# Altium PCB PCB1.PcbDoc
Units mm, origin at the board's own origin, x right, y up, seen from the top; angles counter-clockwise.
Board outline 127 x 101.6 mm, 4 copper layers (Top Layer, Internal Plane 1, Internal Plane 2, Bottom Layer); 30 components, 122 nets, 267 pads, 13 vias.
Unrouted connection lines stored in the file: 7.
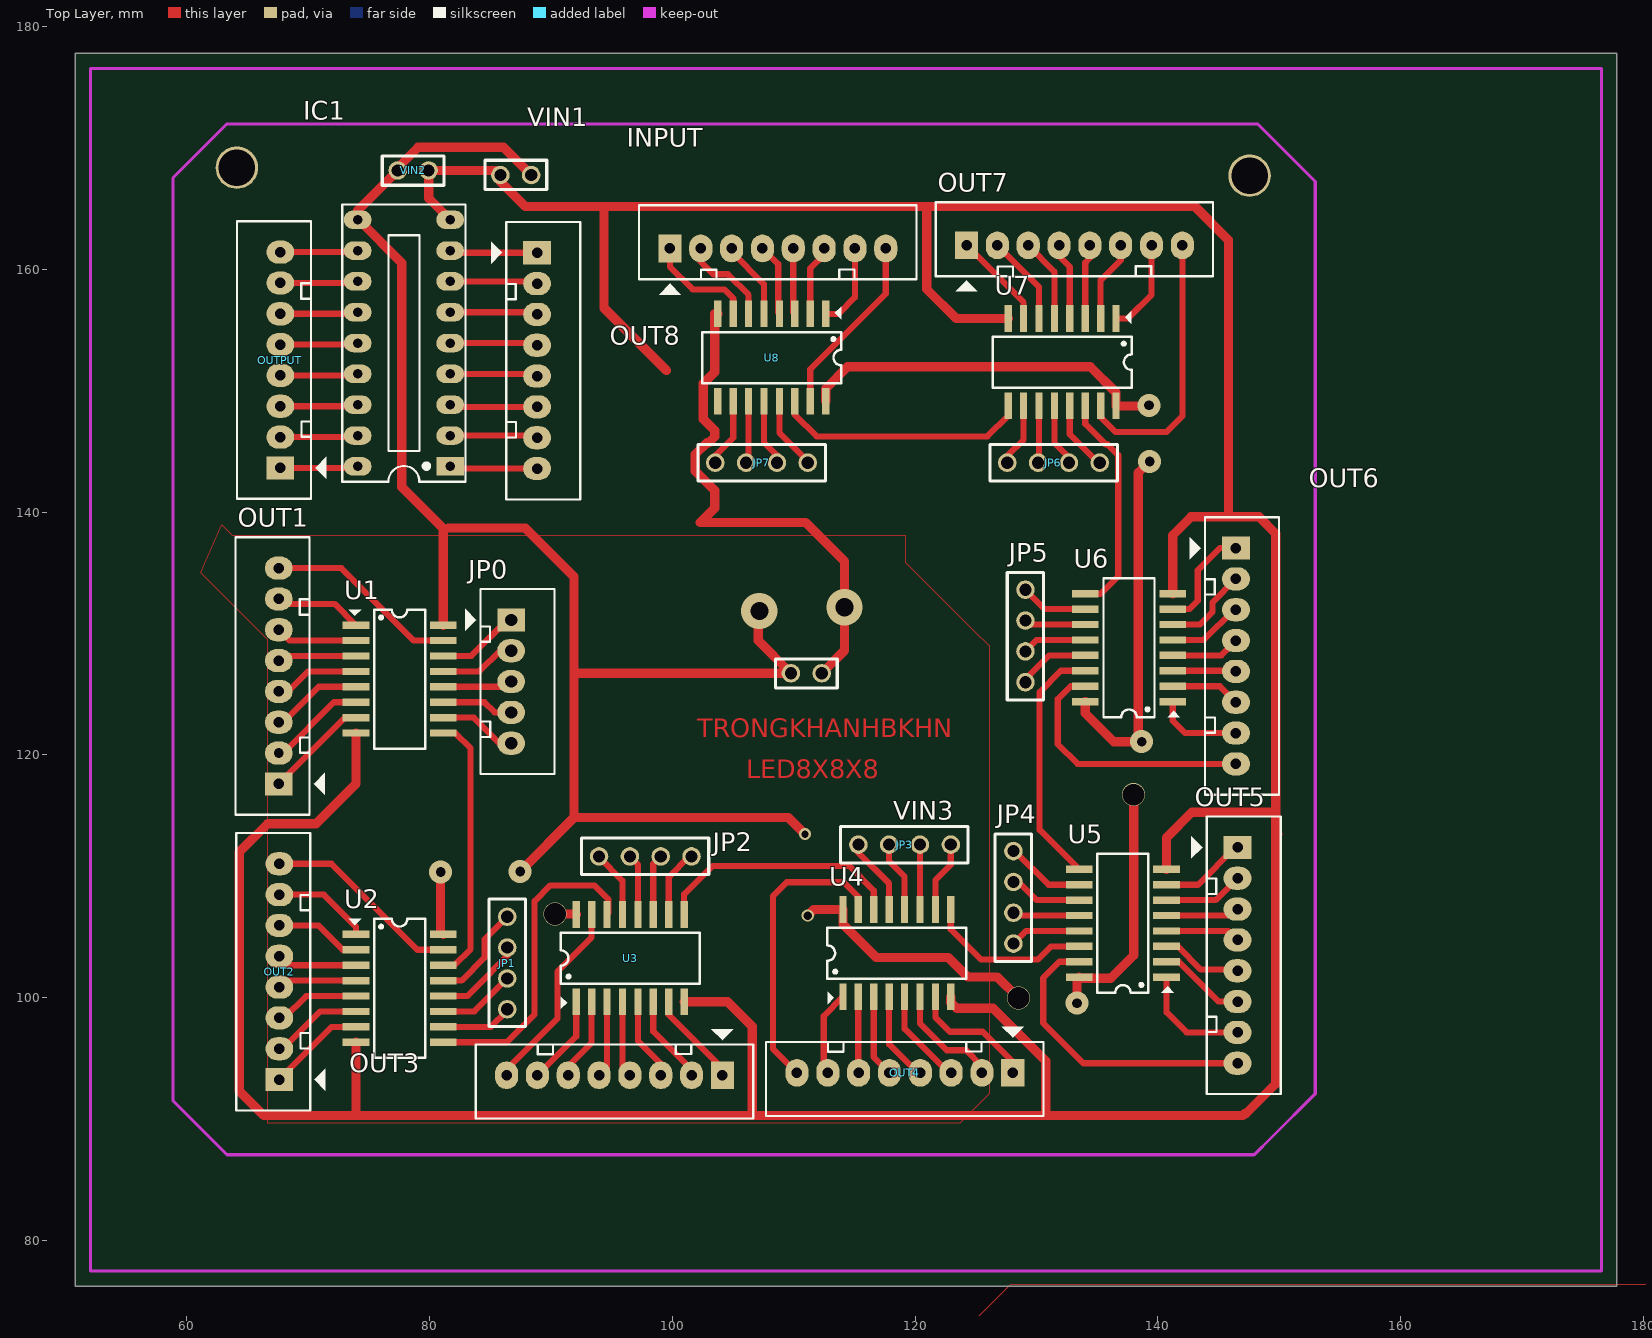
[diagram p0: Top Layer view]
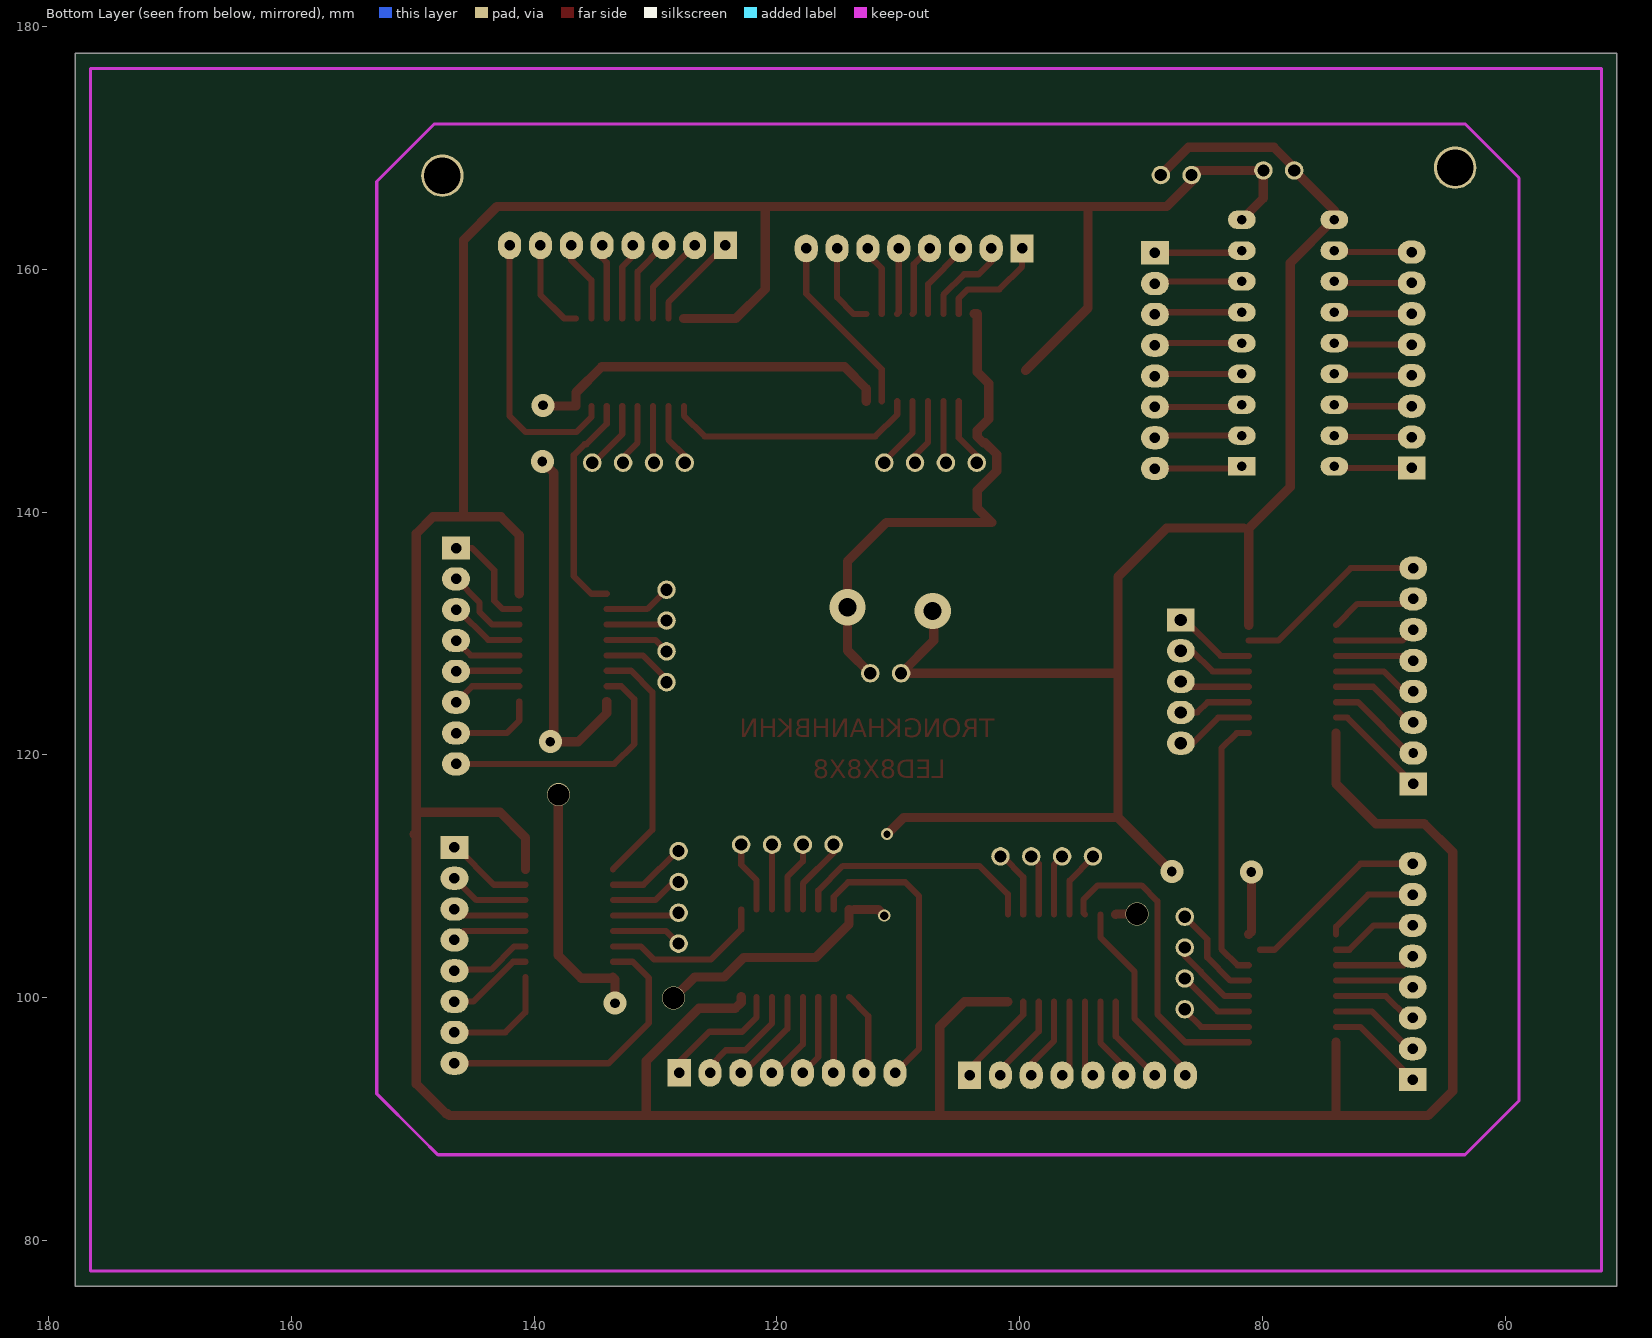
[diagram p1: Bottom Layer view, seen from below]
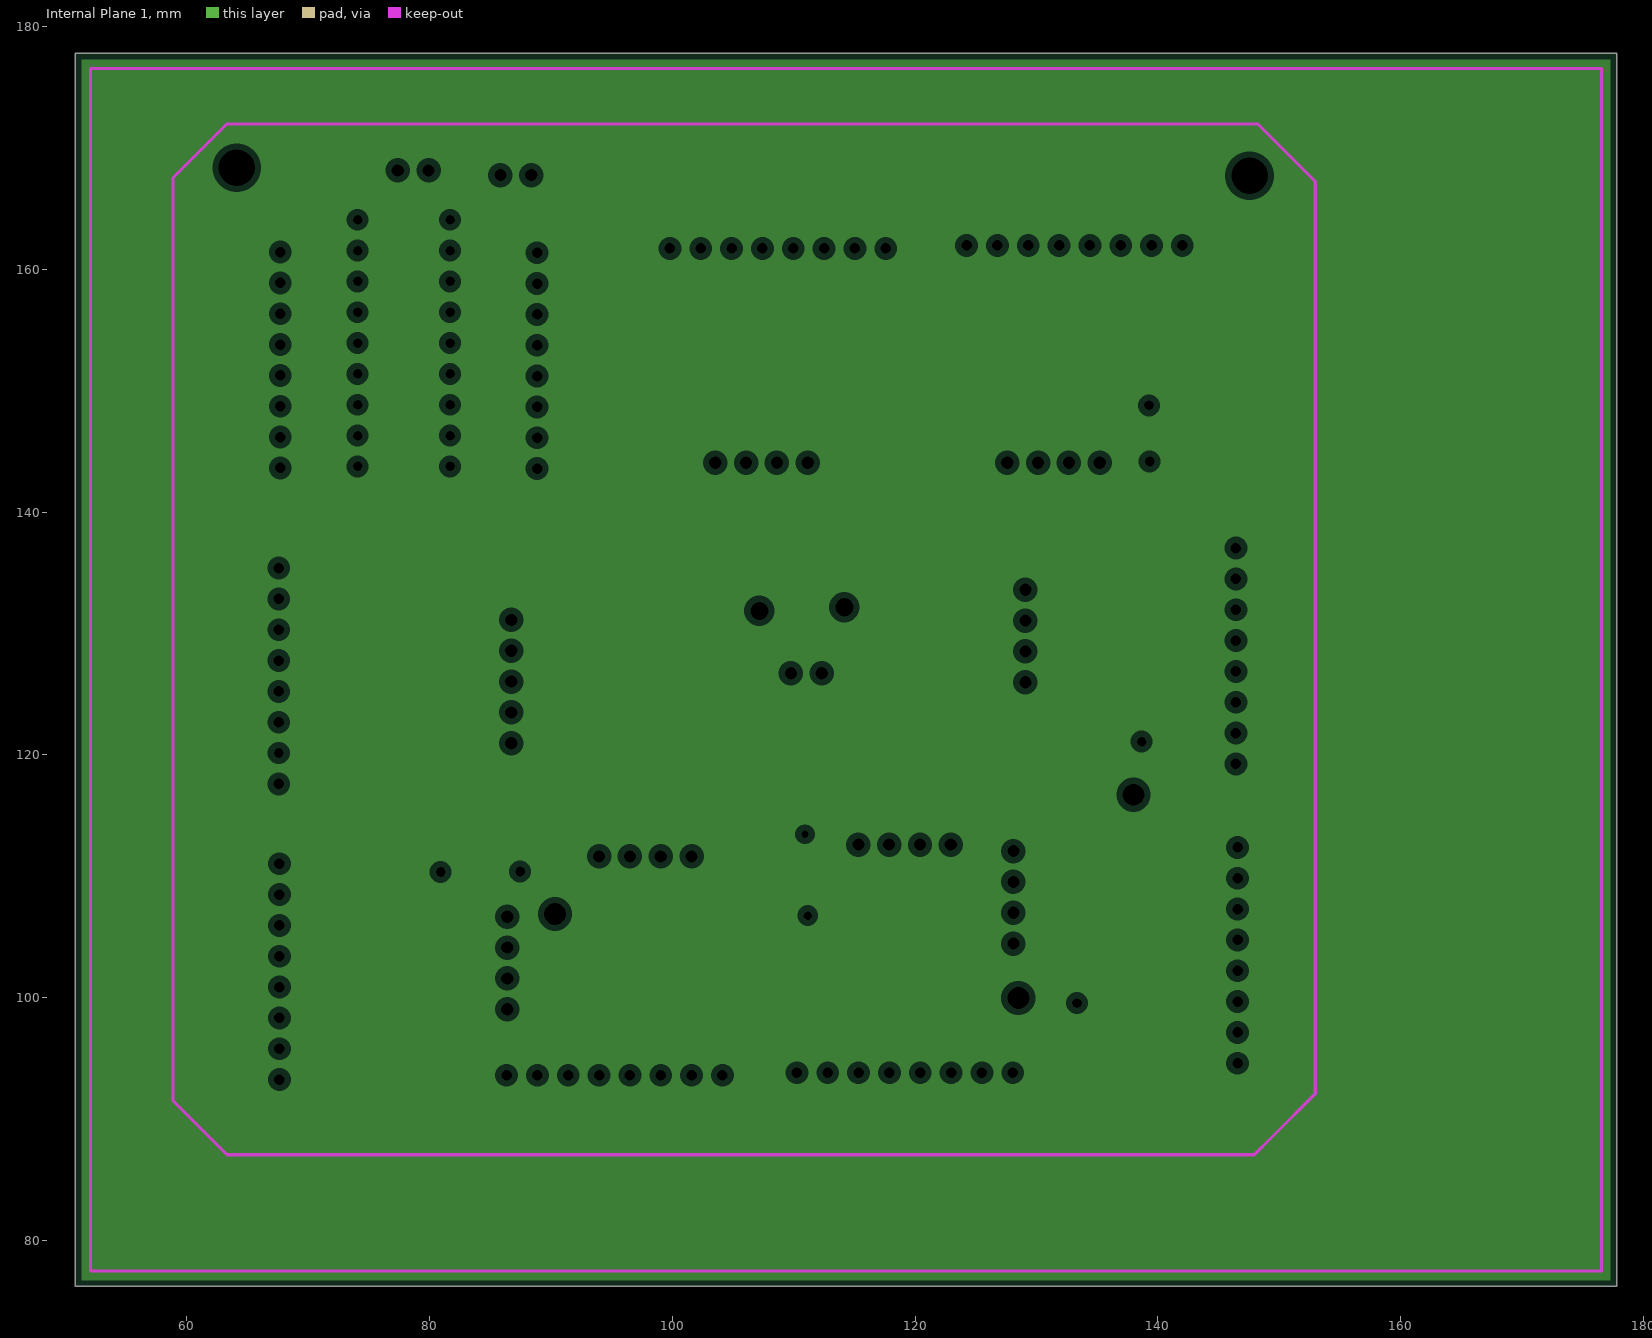
[diagram p2: Internal Plane 1, clearances drawn from the general rule]
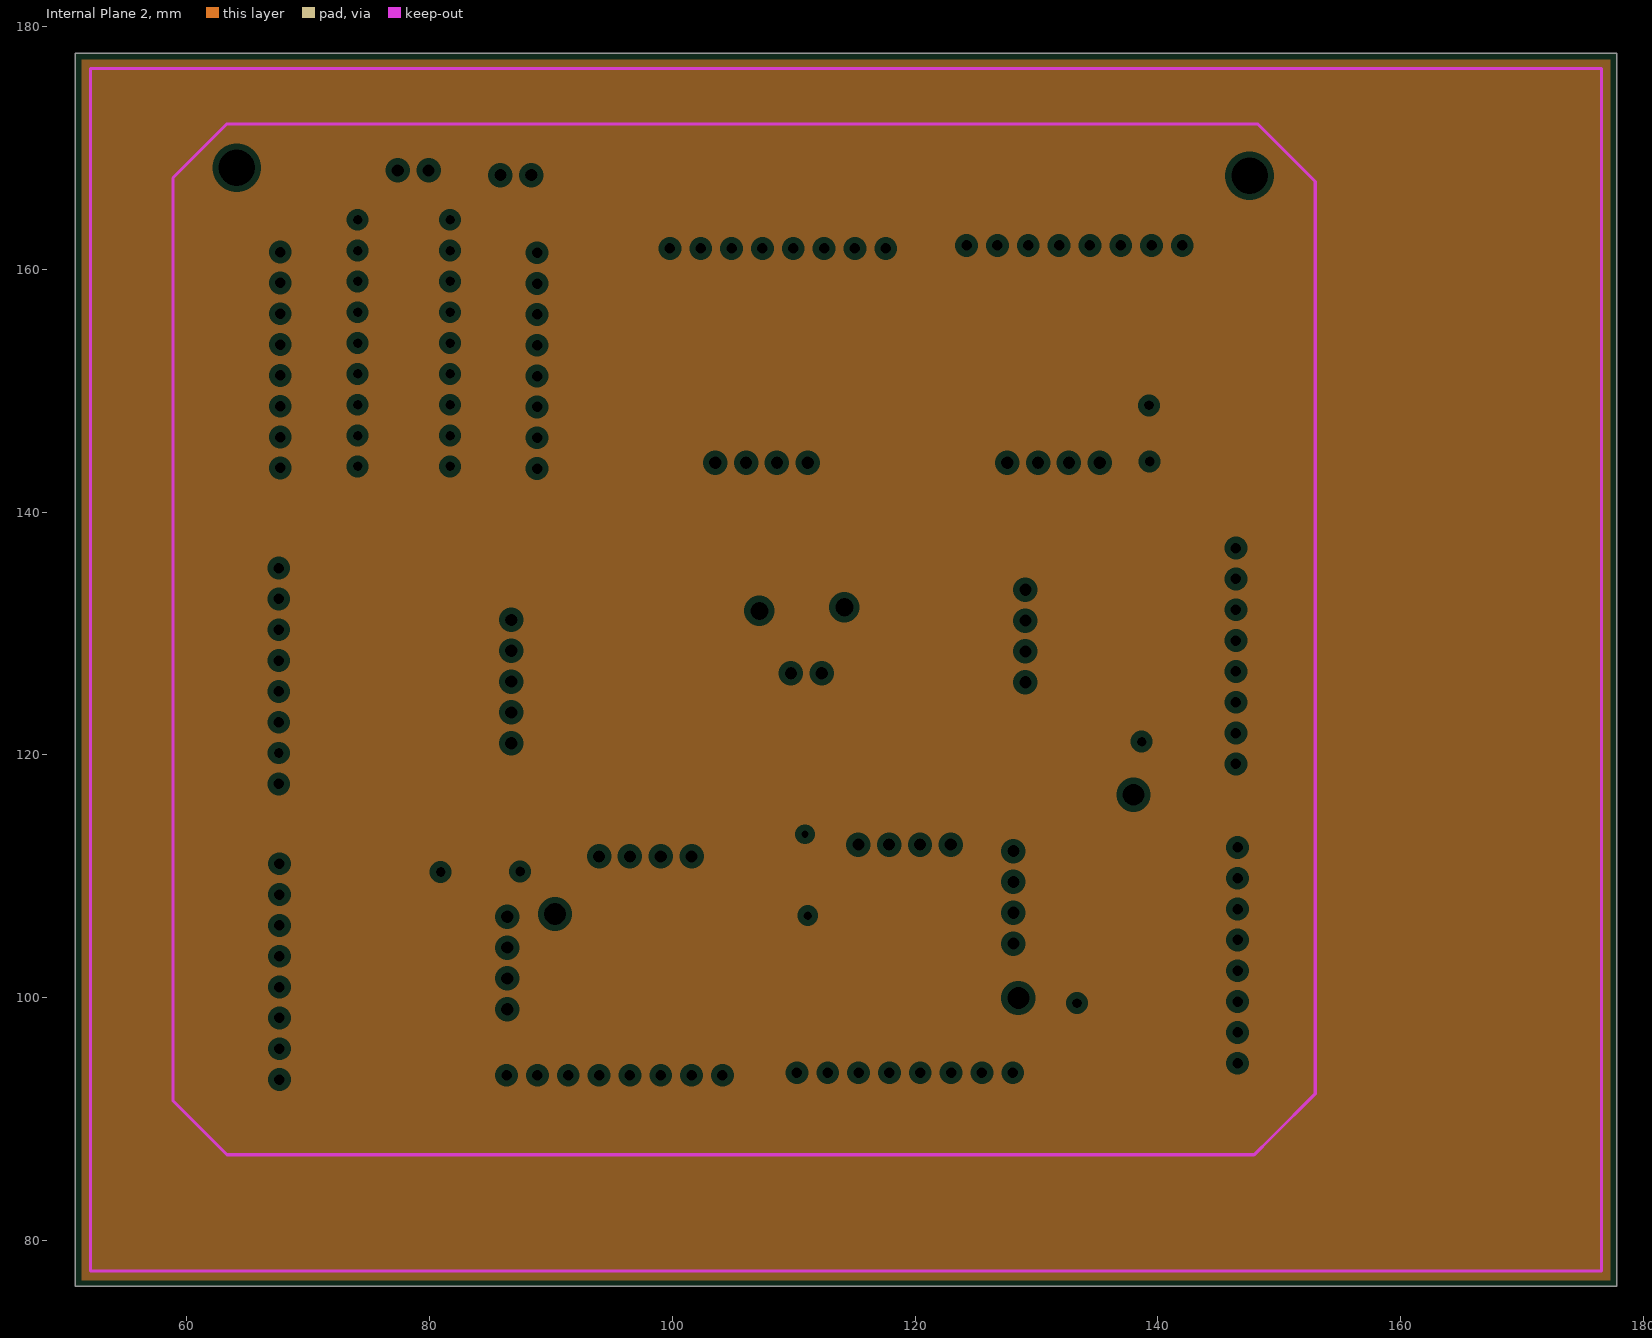
[diagram p3: Internal Plane 2, clearances drawn from the general rule]

## Layer stack, top to bottom
Top Layer: signal copper 0.0356
Dielectric: dielectric 0.32, FR-4, Dk 4.8
Internal Plane 1: plane copper 0.0356
Dielectric: dielectric 0.32, FR-4, Dk 4.8
Internal Plane 2: plane copper 0.0356
Dielectric: dielectric 0.32, FR-4, Dk 4.8
Bottom Layer: signal copper 0.0356

## Board outline
50.8,76.2 177.8,76.2 177.8,177.8 50.8,177.8

## Design rules (kind name [scope] priority, off if disabled: settings)
Clearance Clearance_3 [InNet('VCC2')] p1: gap=1
Clearance Clearance_2 [InNet('GND2')] p2: gap=0.508
Clearance Clearance_1 [InNet('VCC2')] p3: gap=1.016
Clearance [All] p4: gap=0.508
PlaneClearance [All] p1: clearance=0.508
PlaneConnect [All] p1: planeconnectstyle=Relief reliefexpansion=0.508 reliefentries=4 reliefconductorwidth=0.254 reliefairgap=0.254
PolygonConnect top [All vs IsNamedPolygon('Top Layer-No Net')] p1: connectstyle=Relief reliefconductorwidth=0.254 reliefentries=4 polygonreliefangle="90 Angle" airgapwidth=0.254
PolygonConnect [All] p2: connectstyle=Relief reliefconductorwidth=0.254 reliefentries=4 polygonreliefangle="90 Angle" airgapwidth=0.254
RoutingTopology [All] p1: topology=Daisy_Simple
RoutingVias [All] p1: holewidth=0.635 width=1.016 viastyle="Through Hole" minholewidth=0.711 minwidth=1.27 maxholewidth=0.711 maxwidth=1.27
SilkToSolderMaskClearance SilkscreenOverComponentPads [IsPad] p1: minsilkscreentomaskgap=0.254 clearancetoexposedcopper=TRUE
SolderMaskExpansion [All] p1: expansion=0.076
Width Width_2 [InNet('GND2')] p1: maxlimit=0.762 minlimit=0.762 preferedwidth=0.762
Width Width_1 [InNet('VCC2')] p2: maxlimit=0.762 minlimit=0.762 preferedwidth=0.762
Width [All] p3: maxlimit=0.508 minlimit=0.508 preferedwidth=0.508
24 further rules are at their usual default settings.

## Components (designator, comment, footprint, x,y, rotation, side; value= is the part's Value field where it differs from the comment)
IC1 "ULN2803A" DIP18/W0.3 81.686,143.764 r90 top
INPUT "JP8" CON8#1 88.849,161.366 r270 top
JP0 "JP5" CON5 86.716,131.115 r270 top
JP1 "JP4" CON4 86.385,104.115 r270 top
JP2 "JP4" CON4 96.495,111.633 r0 top
JP3 "JP4" CON4 117.856,112.598 r0 top
JP4 "JP4" CON4 128.092,106.985 r90 top
JP5 "JP4" CON4 129.083,128.524 r90 top
JP6 "JP4" CON4 132.664,144.069 r180 top
JP7 "JP4" CON4 108.61,144.069 r180 top
OUT1 "JP8" CON8#2 67.564,117.602 r90 top
OUT2 "JP8" CON8#1 67.615,93.243 r90 top
OUT3 "JP8" CON8#1 104.115,93.599 r180 top
OUT4 "JP8" CON8#1 128.041,93.802 r180 top
OUT5 "JP8" CON8#1 146.558,112.37 r270 top
OUT6 "JP8" CON8#1 146.431,137.033 r270 top
OUT7 "JP8" CON8#1 124.231,161.976 r0 top
OUT8 "JP8" CON8#1 99.797,161.722 r0 top
OUTPUT "JP8" CON8#1 67.691,143.637 r90 top
U1 "74HC595" SOP16 77.521,126.238 r270 top
U2 "74HC595" SOP16 77.521,100.762 r270 top
U3 "74HC595" SOP16 96.52,103.251 r0 top
U4 "74HC595" SOP16 118.491,103.657 r0 top
U5 "74HC595" SOP16 137.109,106.121 r90 top
U6 "74HC595" SOP16 137.617,128.829 r90 top
U7 "74HC595" SOP16 132.105,152.349 r180 top
U8 "74HC595" SOP16 108.179,152.73 r180 top
VIN1 "JP2" CON2 87.122,167.767 r0 top
VIN2 "JP2" CON2 78.613,168.148 r180 top
VIN3 "JP3" CON2 110.998,126.721 r180 top

## Footprints (in the part's own frame and the unit in brackets; to place one, negate y for a bottom-side part, rotate by r counter-clockwise, add the part's x,y. Pads: shape width x height; smd on the part's side, far side on the other; paste and mask are expansions set on the pad)
CON2 [mm] "2-Pin Connector; pitch 2.54mm"
  round 1.524 hole 1: 1(-1.3,0) 2(1.24,0)
  silkscreen extent -2.58,-1.18 2.52,1.22
CON4 [mil] "4-Pin Connector; pitch 2.54mm"
  round 60 hole 39.37: 1(-100,0) 2(0,0) 3(100,0) 4(200,0)
  silkscreen extent -157,-59 256,59
CON5 [mm] "CON5"
  rect 1.905x2.286 hole 1: 1(0,0)
  oval 1.905x2.286 hole 1: 2(2.54,0) 3(5.08,0) 4(7.62,0) 5(10.16,0)
  silkscreen extent -2.54,-3.8 12.7,3.56, body extent -2.63,-2.7 12.83,3.7, height 7
CON8#1 [mil] "CON8"
  rect 75x90 hole 34: 1(0,0)
  oval 75x90 hole 34: 2(100,0) 3(200,0) 4(300,0) 5(400,0) 6(500,0) 7(600,0) 8(700,0)
  silkscreen extent -100,-150 800,140
CON8#2 [mil] "CON8"
  rect 75x90 hole 34: 1(0,0)
  oval 75x90 hole 31.5: 2(100,0)
  oval 75x90 hole 34: 3(200,0) 4(300,0) 5(400,0) 6(500,0) 7(600,0) 8(700,0)
  silkscreen extent -100,-150 800,140
DIP18/W0.3 [mil] "18 PIN, W 300mil, Pin to pin 100mil"
  rect 60x90 hole 31: 1(0,0)
  oval 60x90 hole 31: 2(100,0) 3(200,0) 4(300,0) 5(400,0) 6(500,0) 7(600,0) 8(700,0) 9(800,0) 10(800,300) 11(700,300) 12(600,300) 13(500,300) 14(400,300) 15(300,300) 16(200,300) 17(100,300) 18(0,300)
  silkscreen extent -50,-50 850,350, body extent -51,-57 849,356, height 119
SOP16 [mm] "Small Outline; 16 Leads; Body Width 5.6 mm; Pitch 1.27 mm"
  rect 0.6x2.2 smd: 1(-4.445,-3.6) 2(-3.175,-3.6) 3(-1.905,-3.6) 4(-0.635,-3.6) 5(0.635,-3.6) 6(1.905,-3.6) 7(3.175,-3.6) 8(4.445,-3.6) 9(4.445,3.6) 10(3.175,3.6) 11(1.905,3.6) 12(0.635,3.6) 13(-0.635,3.6) 14(-1.905,3.6) 15(-3.175,3.6) 16(-4.445,3.6)
  silkscreen extent -5.73,-4.19 5.73,2.1

## Part data
IC1: "High-Voltage, High-Current Darlington Array"
INPUT OUT1 OUT2 OUT3 OUT4 OUT5 OUT6 OUT7 OUT8 OUTPUT: library part Con8, "Connector 8"
JP0: library part Con5, "Connector 5"
JP1 JP2 JP3 JP4 JP5 JP6 JP7: library part Con4, "Connector 4"
VIN1 VIN2 VIN3: library part Con2, "Connector 2"

## Free pads (board coordinates)
  round 3.5 hole 3: 1(64.11,168.377) 2(147.549,167.716)

## Via types
v1: diameter 1.9, hole 0.8, Top Layer to Bottom Layer, 6 vias
v2: diameter 1.9, hole 1.8, Top Layer to Bottom Layer, 3 vias
v3: diameter 3, hole 1.5, Top Layer to Bottom Layer, 2 vias
v4: diameter 1, hole 0.7, Top Layer to Bottom Layer, tented top, 1 vias
v5: diameter 1, hole 0.6, Top Layer to Bottom Layer, 1 vias

## Nets (pads, with @x,y where several pads share a name; then routed paths per layer and width w, separated by ;. In a path a pad name is that pad's centre, name@x,y a point inside that pad or via, vN(x,y) a via of type N, cw(c..) or ccw(c..) an arc to the next point about the centre after c; other vN are vias at no path point)
GND2: IC1.9 U1.8 U2.8 U3.8 U4.8 U5.8 U6.8 U7.8 U8.8 VIN1.1 VIN2.1 VIN3.1 | length 399.9
  Top Layer w0.762: U2.8 73.921,90.278 ; U1.8 73.921,117.609 70.637,114.325 66.65,114.325 64.313,111.989 64.313,92.304 66.338,90.278 73.921,90.278 ; IC1.9 79.913,165.857 VIN2.1 85.441,168.148 VIN1.1 85.822,167.238 87.884,165.176 94.361,165.176 ; 99.517,151.663 94.361,156.82 94.361,165.176 ; U3.8 104.54,99.651 106.578,97.612 106.578,90.373 ; U8.8 103.48,156.33 103.48,151.533 102.545,150.598 102.545,147.662 103.48,146.727 103.48,146.219 102.981,145.72 102.847,145.72 101.879,144.753 101.879,143.385 103.48,141.785 103.48,140.335 102.286,139.141 110.973,139.141 114.173,135.941 v3(114.173,132.156) 114.173,128.596 VIN3.1 ; U4.8 122.936,99.593 123.419,99.111 126.416,99.111 130.759,94.767 130.759,90.278 ; U7.8 123.375,155.949 120.955,158.369 120.955,165.176 ; U5.8 140.709,113.176 142.799,115.265 149.631,115.265 149.708,115.341 ; U6.8 141.217,138.093 142.735,139.611 145.796,139.611 ; 149.885,113.462 149.708,113.284 ; 73.921,90.278 130.759,90.278 ; 94.361,165.176 120.955,165.176 ; 120.955,165.176 143.053,165.176 145.821,162.408 145.821,139.636 145.796,139.611 ; 130.759,90.278 146.983,90.278 147.129,90.424 147.244,90.424 149.708,92.888 149.708,113.284 ; 145.796,139.611 148.323,139.611 149.708,138.227 149.708,115.341 ; 149.708,113.284 149.708,115.341
NetIC1_1: IC1.1 INPUT.8 | length 7
  Top Layer w0.508: IC1.1@81.864,143.586 INPUT.8
NetIC1_2: IC1.2 INPUT.7 | length 7
  Top Layer w0.508: IC1.2 INPUT.7@88.671,146.304
NetIC1_3: IC1.3 INPUT.6 | length 7
  Top Layer w0.508: IC1.3@81.864,148.666 INPUT.6
NetIC1_4: IC1.4 INPUT.5 | length 7
  Top Layer w0.508: IC1.4 INPUT.5@88.671,151.384
NetIC1_5: IC1.5 INPUT.4 | length 7
  Top Layer w0.508: IC1.5 INPUT.4@88.671,153.924
NetIC1_6: IC1.6 INPUT.3 | length 7
  Top Layer w0.508: IC1.6 INPUT.3@88.671,156.464
NetIC1_7: IC1.7 INPUT.2 | length 7
  Top Layer w0.508: IC1.7 INPUT.2@88.671,159.004
NetIC1_8: IC1.8 INPUT.1 | length 7.2
  Top Layer w0.508: IC1.8 81.864,161.366 INPUT.1
NetIC1_11: IC1.11 OUTPUT.8 | length 6.2
  Top Layer w0.508: OUTPUT.8 IC1.11@73.939,161.417
NetIC1_12: IC1.12 OUTPUT.7 | length 6.2
  Top Layer w0.508: OUTPUT.7 IC1.12@73.939,158.877
NetIC1_13: IC1.13 OUTPUT.6 | length 6.2
  Top Layer w0.508: OUTPUT.6 IC1.13@73.939,156.337
NetIC1_14: IC1.14 OUTPUT.5 | length 6.2
  Top Layer w0.508: OUTPUT.5 IC1.14@73.939,153.797
NetIC1_15: IC1.15 OUTPUT.4 | length 6.2
  Top Layer w0.508: OUTPUT.4 IC1.15@73.939,151.257
NetIC1_16: IC1.16 OUTPUT.3 | length 6.2
  Top Layer w0.508: OUTPUT.3 IC1.16@73.939,148.717
NetIC1_17: IC1.17 OUTPUT.2 | length 6.2
  Top Layer w0.508: OUTPUT.2 IC1.17@73.939,146.177
NetIC1_18: IC1.18 OUTPUT.1 | length 6.4
  Top Layer w0.508: OUTPUT.1 73.939,143.637 IC1.18
NetJP0_1: JP0.1 U1.14 | length 6.8
  Top Layer w0.508: U1.14 83.439,128.143 86.411,131.115 JP0.1
NetJP0_2: JP0.2 U1.13 | length 5.4
  Top Layer w0.508: U1.13 84.099,126.873 JP0.2@85.801,128.575
NetJP0_3: JP0.3 U1.12 | length 5.7
  Top Layer w0.508: U1.12 86.284,125.603 JP0.3@86.695,126.014
NetJP0_4: JP0.4 U1.11 | length 5.9
  Top Layer w0.508: U1.11 84.506,124.333 85.344,123.495 JP0.4
NetJP0_5: JP0.5 U1.10 | length 5.5
  Top Layer w0.508: U1.10 83.642,123.063 JP0.5@85.75,120.955
NetJP1_1: JP1.1 U2.13 | length 8.3
  Top Layer w0.508: U2.13 82.626,101.397 84.531,103.302 84.531,104.8 JP1.1
NetJP1_2: JP1.2 U2.12 | length 7.3
  Top Layer w0.508: U2.12 83.109,100.127 85.065,102.083 85.065,102.122 86.385,103.442 JP1.2
NetJP1_3: JP1.3 U2.11 | length 6.4
  Top Layer w0.508: U2.11 83.668,98.857 JP1.3
NetJP1_4: JP1.4 U2.10 | length 5.9
  Top Layer w0.508: U2.10 85.039,97.587 86.385,98.933 JP1.4
NetJP2_1: JP2.1 U3.13 | length 5.5
  Top Layer w0.508: JP2.1@93.955,111.557 95.885,109.626 U3.13
NetJP2_2: JP2.2 U3.12 | length 5.1
  Top Layer w0.508: JP2.2 97.155,110.973 U3.12
NetJP2_3: JP2.3 U3.11 | length 5
  Top Layer w0.508: U3.11 98.425,111.023 JP2.3
NetJP2_4: JP2.4 U3.10 | length 5.7
  Top Layer w0.508: U3.10 99.695,109.931 101.397,111.633 JP2.4
NetJP3_1: JP3.1 U4.13 | length 6.4
  Top Layer w0.508: JP3.1 115.316,111.938 117.856,109.398 U4.13
NetJP3_2: JP3.2 U4.12 | length 5.9
  Top Layer w0.508: JP3.2 117.856,111.227 119.126,109.957 U4.12
NetJP3_3: JP3.3 U4.11 | length 5.3
  Top Layer w0.508: U4.11 JP3.3
NetJP3_4: JP3.4 U4.10 | length 5.9
  Top Layer w0.508: U4.10 121.666,109.677 122.936,110.947 JP3.4
NetJP4_1: JP4.1 U5.13 | length 5.8
  Top Layer w0.508: JP4.1 129.134,105.486 U5.13
NetJP4_2: JP4.2 U5.12 | length 5.5
  Top Layer w0.508: JP4.2 128.321,106.756 U5.12
NetJP4_3: JP4.3 U5.11 | length 6
  Top Layer w0.508: JP4.3 128.499,109.525 129.997,108.026 U5.11
NetJP4_4: JP4.4 U5.10 | length 6.6
  Top Layer w0.508: JP4.4 128.219,112.065 130.988,109.296 U5.10
NetJP5_1: JP5.1 U6.13 | length 6
  Top Layer w0.508: JP5.1 129.083,126.238 131.039,128.194 U6.13
NetJP5_2: JP5.2 U6.12 | length 5.3
  Top Layer w0.508: JP5.2 130.023,129.464 U6.12
NetJP5_3: JP5.3 U6.11 | length 5.1
  Top Layer w0.508: JP5.3 129.413,130.734 U6.11
NetJP5_4: JP5.4 U6.10 | length 5.6
  Top Layer w0.508: JP5.4 130.683,132.004 U6.10
NetJP6_1: JP6.1 U7.13 | length 5.8
  Top Layer w0.508: U7.13 132.74,146.431 135.103,144.069 JP6.1
NetJP6_2: JP6.2 U7.12 | length 5.2
  Top Layer w0.508: U7.12 131.47,145.72 132.664,144.526 JP6.2
NetJP6_3: JP6.3 U7.11 | length 4.7
  Top Layer w0.508: JP6.3 130.2,144.145 U7.11
NetJP6_4: JP6.4 U7.10 | length 5.2
  Top Layer w0.508: JP6.4 127.584,144.628 128.93,145.974 U7.10
NetJP7_1: JP7.1 U8.13 | length 5.9
  Top Layer w0.508: U8.13 108.814,146.533 JP7.1@111.15,144.196
NetJP7_2: JP7.2 U8.12 | length 4.9
  Top Layer w0.508: U8.12 107.544,145.745 JP7.2@108.61,144.678
NetJP7_3: JP7.3 U8.11 | length 4.9
  Top Layer w0.508: JP7.3@106.274,144.272 U8.11
NetJP7_4: JP7.4 U8.10 | length 5.1
  Top Layer w0.508: JP7.4@103.53,144.653 105.004,146.126 U8.10
NetOUT1_1: OUT1.1 U1.7 | length 8.6
  Top Layer w0.508: OUT1.1 67.564,117.626 73.001,123.063 U1.7
NetOUT1_2: OUT1.2 U1.6 | length 7.7
  Top Layer w0.508: OUT1.2@67.92,120.142 72.111,124.333 U1.6
NetOUT1_3: OUT1.3 U1.5 | length 7.2
  Top Layer w0.508: OUT1.3@67.945,122.682 70.866,125.603 U1.5
NetOUT1_4: OUT1.4 U1.4 | length 7
  Top Layer w0.508: OUT1.4 68.326,125.222 69.977,126.873 U1.4
NetOUT1_5: OUT1.5 U1.3 | length 6
  Top Layer w0.508: OUT1.5@67.945,128.143 U1.3
NetOUT1_6: OUT1.6 U1.2 | length 6.7
  Top Layer w0.508: OUT1.6 68.453,129.413 U1.2
NetOUT1_7: OUT1.7 U1.1 | length 7.3
  Top Layer w0.508: OUT1.7 67.97,132.436 72.168,132.436 U1.1
NetOUT2_1: OUT2.1 U2.7 | length 8.1
  Top Layer w0.508: OUT2.1 67.615,93.269 71.933,97.587 U2.7
NetOUT2_2: OUT2.2 U2.6 | length 7.6
  Top Layer w0.508: OUT2.2 67.894,95.783 70.968,98.857 U2.6
NetOUT2_3: OUT2.3 U2.5 | length 7.1
  Top Layer w0.508: OUT2.3 68.021,98.323 69.825,100.127 U2.5
NetOUT2_4: OUT2.4 U2.4 | length 6.5
  Top Layer w0.508: OUT2.4 68.148,101.397 U2.4
NetOUT2_5: OUT2.5 U2.3 | length 6.6
  Top Layer w0.508: OUT2.5 68.351,102.667 U2.3
NetOUT2_6: OUT2.6 U2.2 | length 7.1
  Top Layer w0.508: OUT2.6 70.815,105.943 72.822,103.937 U2.2
NetOUT2_7: OUT2.7 U2.1 | length 8
  Top Layer w0.508: OUT2.7 71.272,108.483 73.921,105.835 U2.1
NetOUT3_1: OUT3.1 U3.7 | length 7.3
  Top Layer w0.508: U3.7 99.695,98.577 OUT3.1@104.115,94.158
NetOUT3_2: OUT3.2 U3.6 | length 7.4
  Top Layer w0.508: U3.6 98.425,97.206 101.575,94.056 OUT3.2
NetOUT3_3: OUT3.3 U3.5 | length 6.8
  Top Layer w0.508: U3.5 97.155,96.444 99.035,94.564 OUT3.3
NetOUT3_4: OUT3.4 U3.4 | length 6.3
  Top Layer w0.508: U3.4 95.885,94.209 OUT3.4
NetOUT3_5: OUT3.5 U3.3 | length 6.3
  Top Layer w0.508: OUT3.5 94.615,94.259 U3.3
NetOUT3_6: OUT3.6 U3.2 | length 6.1
  Top Layer w0.508: OUT3.6@91.415,94.361 93.345,96.291 U3.2
NetOUT3_7: OUT3.7 U3.1 | length 7.4
  Top Layer w0.508: OUT3.7 92.075,96.799 U3.1
NetOUT4_1: OUT4.1 U4.7 | length 10.5
  Top Layer w0.508: U4.7 121.666,98.374 122.86,97.18 125.552,97.18 128.041,94.691 OUT4.1
NetOUT4_2: OUT4.2 U4.6 | length 9.3
  Top Layer w0.508: U4.6 120.396,97.866 122.606,95.656 124.206,95.656 125.501,94.361 OUT4.2
NetOUT4_3: OUT4.3 U4.5 | length 8
  Top Layer w0.508: U4.5 119.126,97.425 122.749,93.802 OUT4.3
NetOUT4_4: OUT4.4 U4.4 | length 7.4
  Top Layer w0.508: U4.4 117.856,96.155 120.209,93.802 OUT4.4
NetOUT4_5: OUT4.5 U4.3 | length 6.8
  Top Layer w0.508: U4.3 116.586,95.098 OUT4.5
NetOUT4_6: OUT4.6 U4.2 | length 6.3
  Top Layer w0.508: U4.2 115.316,93.828 OUT4.6
NetOUT4_7: OUT4.7 U4.1 | length 7
  Top Layer w0.508: OUT4.7 112.464,94.139 112.464,98.476 U4.1
NetOUT5_1: OUT5.1 U5.7 | length 7.1
  Top Layer w0.508: U5.7 143.307,109.296 146.38,112.37 OUT5.1
NetOUT5_2: OUT5.2 U5.6 | length 6.6
  Top Layer w0.508: U5.6 144.755,108.026 OUT5.2
NetOUT5_3: OUT5.3 U5.5 | length 5.3
  Top Layer w0.508: U5.5 OUT5.3@146.025,106.756
NetOUT5_4: OUT5.4 U5.4 | length 5.1
  Top Layer w0.508: U5.4 OUT5.4@145.821,105.486
NetOUT5_5: OUT5.5 U5.3 | length 6.5
  Top Layer w0.508: U5.3 141.63,104.216 143.535,102.311 OUT5.5@146.456,102.311
NetOUT5_6: OUT5.6 U5.2 | length 7.2
  Top Layer w0.508: U5.2 141.732,102.946 145.009,99.67 OUT5.6
NetOUT5_7: OUT5.7 U5.1 | length 9.4
  Top Layer w0.508: U5.1 140.709,98.787 142.367,97.13 OUT5.7
NetOUT6_1: OUT6.1 U6.7 | length 8.8
  Top Layer w0.508: U6.7 142.596,132.004 143.281,132.69 143.281,135.204 145.11,137.033 OUT6.1
NetOUT6_2: OUT6.2 U6.6 | length 7.2
  Top Layer w0.508: U6.6 143.459,130.734 144.501,131.775 144.501,132.563 OUT6.2
NetOUT6_3: OUT6.3 U6.5 | length 6.2
  Top Layer w0.508: U6.5 143.789,129.464 146.279,131.953 OUT6.3
NetOUT6_4: OUT6.4 U6.4 | length 5.7
  Top Layer w0.508: U6.4 145.212,128.194 OUT6.4
NetOUT6_5: OUT6.5 U6.3 | length 5.2
  Top Layer w0.508: U6.3 146.38,126.924 OUT6.5
NetOUT6_6: OUT6.6 U6.2 | length 5.8
  Top Layer w0.508: U6.2 145.11,125.654 OUT6.6
NetOUT6_7: OUT6.7 U6.1 | length 7.2
  Top Layer w0.508: U6.1 141.217,122.816 142.24,121.793 OUT6.7
NetOUT7_1: OUT7.1 U7.7 | length 8
  Top Layer w0.508: OUT7.1 128.93,157.277 U7.7
NetOUT7_2: OUT7.2 U7.6 | length 7.4
  Top Layer w0.508: OUT7.2 130.2,158.547 U7.6
NetOUT7_3: OUT7.3 U7.5 | length 6.9
  Top Layer w0.508: OUT7.3 131.47,159.817 U7.5
NetOUT7_4: OUT7.4 U7.4 | length 6.4
  Top Layer w0.508: OUT7.4 131.851,161.087 132.74,160.198 U7.4
NetOUT7_5: OUT7.5 U7.3 | length 6.2
  Top Layer w0.508: U7.3 134.01,160.553 134.391,160.934 OUT7.5
NetOUT7_6: OUT7.6 U7.2 | length 6.7
  Top Layer w0.508: U7.2 135.28,159.106 136.931,160.757 OUT7.6
NetOUT7_7: OUT7.7 U7.1 | length 7.8
  Top Layer w0.508: U7.1 137.534,155.949 139.471,157.886 OUT7.7
NetOUT8_1: OUT8.1 U8.7 | length 9.1
  Top Layer w0.508: OUT8.1 99.797,160.223 101.676,158.344 104.265,158.344 105.004,157.605 U8.7
NetOUT8_2: OUT8.2 U8.6 | length 7.7
  Top Layer w0.508: OUT8.2 102.337,160.63 103.378,159.588 104.572,159.588 106.274,157.886 U8.6
NetOUT8_3: OUT8.3 U8.5 | length 6.5
  Top Layer w0.508: OUT8.3 104.877,161.442 107.544,158.775 U8.5
NetOUT8_4: OUT8.4 U8.4 | length 6
  Top Layer w0.508: OUT8.4 108.712,160.426 108.712,156.432 U8.4
NetOUT8_5: OUT8.5 U8.3 | length 5.4
  Top Layer w0.508: OUT8.5 109.957,156.457 U8.3
NetOUT8_6: OUT8.6 U8.2 | length 5.9
  Top Layer w0.508: U8.2 111.354,160.071 112.497,161.214 OUT8.6
NetOUT8_7: OUT8.7 U8.1 | length 7
  Top Layer w0.508: U8.1 113.684,156.33 115.037,157.683 OUT8.7
NetU1_9: U1.9 U2.14 | length 22.1
  Top Layer w0.508: U2.14 82.041,102.667 83.363,103.989 83.363,120.548 82.118,121.793 U1.9
NetU2_9: U2.9 U3.14 | length 26.2
  Top Layer w0.508: U2.9 86.335,96.317 88.646,98.628 88.646,107.95 89.941,109.245 93.574,109.245 94.742,108.077 94.742,106.978 U3.14
NetU3_9: U3.9 U4.14 | length 20.6
  Top Layer w0.508: U3.9 100.965,108.509 103.302,110.846 114.554,110.846 116.586,108.814 U4.14
NetU5_9: U5.9 U6.14 | length 20.4
  Top Layer w0.508: U5.9 130.251,113.824 130.251,125.171 132.004,126.924 U6.14
NetU6_9: U6.9 U7.14 | length 18.6
  Top Layer w0.508: U7.14 134.01,147.269 135.687,145.593 135.835,145.593 136.728,144.7 136.728,134.722 135.28,133.274 U6.9
NetU7_9: U7.9 U8.14 | length 20.9
  Top Layer w0.508: U8.14 110.084,148.031 111.887,146.228 125.933,146.228 127.66,147.955 U7.9
Q01: OUT1.8 U1.15 | length 16
  Top Layer w0.508: OUT1.8 72.72,135.382 78.689,129.413 U1.15
Q02: OUT2.8 U2.15 | length 15.5
  Top Layer w0.508: OUT2.8 71.907,111.023 78.994,103.937 U2.15@80.201,103.937
Q03: OUT3.8 U3.15 | length 16.2
  Top Layer w0.508: OUT3.8 86.335,94.082 90.526,98.273 90.526,102.133 93.345,104.953 U3.15
Q04: OUT4.8 U4.15 | length 24.4
  Top Layer w0.508: OUT4.8 108.28,95.783 108.28,108.356 109.423,109.499 114.122,109.499 115.316,108.306 U4.15
Q05: OUT5.8 U5.15 | length 24.6
  Top Layer w0.508: U5.15 131.877,102.946 130.556,101.625 130.556,97.892 133.858,94.59 OUT5.8
Q06: OUT6.8 U6.15 | length 21.8
  Top Layer w0.508: U6.15 132.817,125.654 131.75,124.587 131.75,120.879 133.375,119.253 OUT6.8
Q07: OUT7.8 U7.15 | length 22.8
  Top Layer w0.508: U7.15 135.28,147.828 136.5,146.609 140.716,146.609 142.011,147.904 OUT7.8
Q08: OUT8.8 U8.15 | length 15.2
  Top Layer w0.508: U8.15 111.354,151.765 117.577,157.988 OUT8.8
QH4: U4.9 U5.14 | length 13.7
  Top Layer w0.508: U4.9 122.936,105.613 125.425,103.124 130.099,103.124 131.191,104.216 U5.14
VCC2: IC1.10 U1.16 U2.16 U3.16 U4.16 U5.16 U6.16 U7.16 U8.16 VIN1.2 VIN2.2 VIN3.2 | length 247.4
  Top Layer w0.762: v1(80.899,110.338) 80.899,105.429 U2.16 ; U1.16 81.121,138.64 77.699,142.062 77.699,160.528 74.143,164.084 IC1.10 74.066,164.841 VIN2.2 77.373,168.381 79.045,170.053 86.076,170.053 VIN1.2 ; 81.559,138.684 87.884,138.684 91.897,134.671 91.897,126.721 ; v1@87.452,110.668 v1(87.452,110.388) 91.897,114.833 ; v2(90.322,106.883) 92.043,106.883 U3.16 ; v3(107.163,131.851) 107.061,131.75 107.061,129.418 VIN3.2 91.897,126.721 ; v5(110.922,113.462) 109.55,114.833 91.897,114.833 ; v4@111.227,106.756 v4(111.15,106.756) 111.652,107.257 113.619,107.257 ; U8.16 112.624,150.165 114.427,151.968 134.431,151.968 136.55,149.849 U7.16 139.224,148.749 v1(139.268,148.793) ; U4.16 114.046,106.045 116.789,103.302 122.733,103.302 124.333,101.702 126.771,101.702 v2(128.499,99.974) ; v1(133.325,99.543) 133.325,101.492 U5.16 133.585,101.6 136.119,101.6 137.998,103.48 v2(137.998,116.713) ; U6.16 134.017,123.437 136.373,121.082 v1(138.659,121.082) ; v1@138.024,121.183 138.557,121.183 v1(138.659,121.082) ; v1@138.125,121.285 v1(138.659,121.082) ; v1@138.278,121.463 v1(138.659,121.082) ; v1@138.379,121.361 138.379,143.231 v1(139.319,144.17) ; 91.897,114.833 91.897,126.721
pads on no net: U8.9

## Polygon pours and split planes (outlines as drawn)
GND2 on Top Layer "Top Layer-No Net" (solid, remove dead copper, shelved, pour order 10): 127.825,76.334 123.38,71.889 123.38,-4.159 127.825,-8.604 212.458,-8.604 217.335,-3.727 217.335,71.431 217.487,71.584 212.738,76.334 128.003,76.334 127.825,76.334
GND2 on Top Layer "Top Layer-No Net 1" (solid, shelved, pour order 7): 62.865,138.963 63.729,138.1 119.202,138.1 119.202,135.865 124.866,130.2 126.086,128.981 126.086,116.281 126.086,92.075 125.4,91.389 123.673,89.662 66.65,89.662 66.65,129.489 61.138,135.001
GND2 on Keep-Out Layer "Top Layer-No Net" (solid, remove dead copper, shelved): 63.297,171.983 58.852,167.538 58.852,91.643 63.297,87.198 63.297,87.046 147.523,87.046 147.701,87.224 147.701,87.046 147.93,87.046 152.959,92.075 152.806,92.227 152.806,167.386 148.209,171.983 63.297,171.983 58.852,167.538
no net on Internal Plane 1 (split plane): 177.29,76.71 51.31,76.71 51.31,177.29 177.29,177.29
no net on Internal Plane 2 (split plane): 177.29,76.71 51.31,76.71 51.31,177.29 177.29,177.29

## Keep-outs
Keep-Out Layer:
  lines w0.254: 121.641,171.983 148.209,171.983 152.959,167.234 152.959,114.275 ; 122.149,171.983 63.297,171.983 58.852,167.538 58.852,91.491 63.297,87.046 64.592,87.046 147.93,87.046 149.352,88.468 152.959,92.075 152.959,114.427 ; 52.07,77.47 176.53,77.47 176.53,176.53 52.07,176.53 52.07,77.47

## Other copper
Top Layer:
  text "TRONGKHANHBKHN" at 102.032,121.463 h1.52
  text "LED8X8X8" at 106.07,118.085 h1.52

## Dimensions
52.07,77.47 to 176.53,77.47 on Mechanical 1
52.07,77.47 to 52.07,176.53 on Mechanical 1